# Altium PCB NBP7 Xilinx Virtex-II BGA456 Rev1.10.PcbDoc (part 2 of 3)
Units mm, origin at the board's own origin, x right, y up, seen from the top; angles counter-clockwise.
Board outline 69 x 80.99 mm, 6 copper layers (Top Layer, MidLayer1, InternalPlane1, InternalPlane2, MidLayer2, Bottom Layer); 101 components, 273 nets, 963 pads, 545 vias.
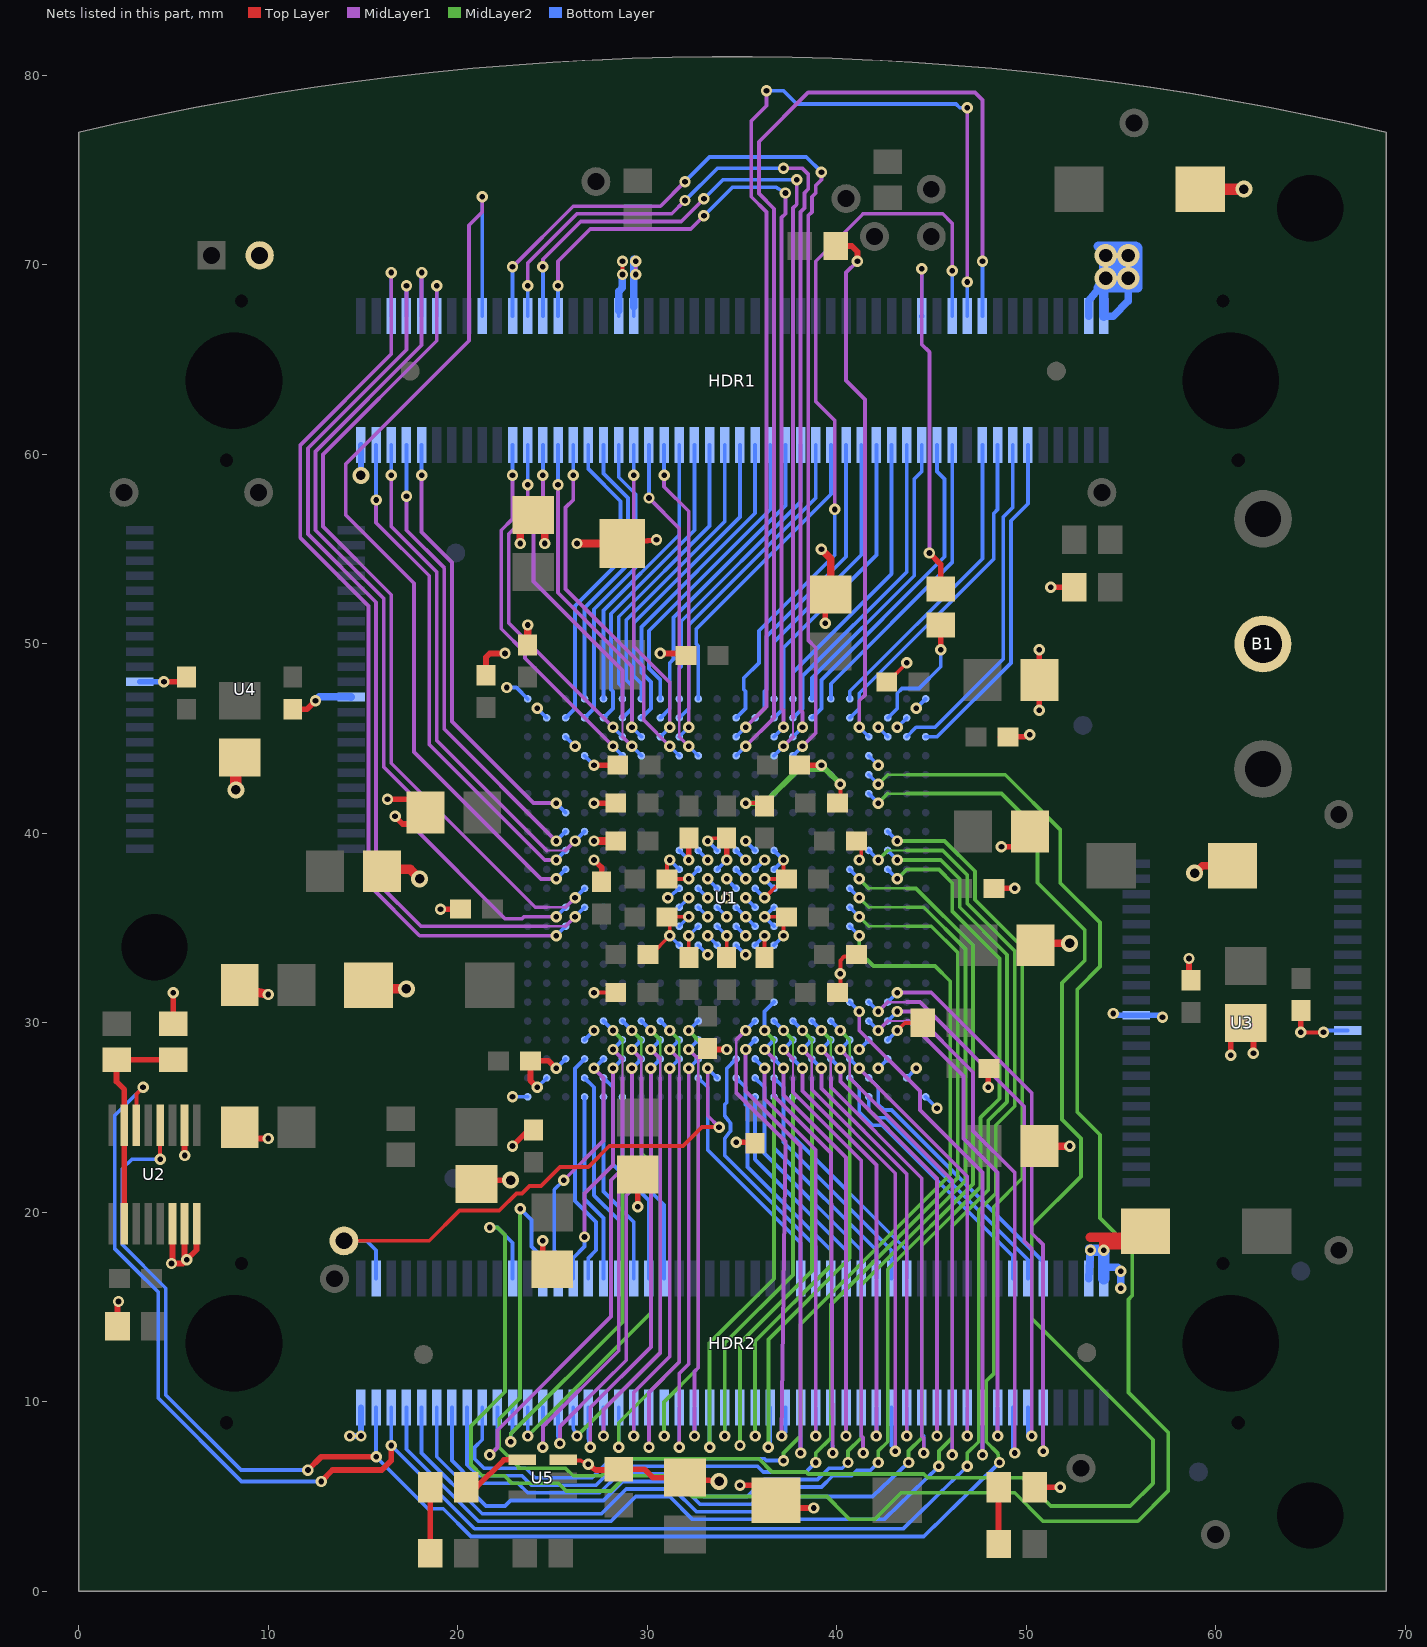
[diagram p6: the nets of this part, all layers, seen from the top]

## Via types
v1: diameter 0.6, hole 0.3, Top Layer to Bottom Layer, tented bottom, 520 vias
v2: diameter 0.9, hole 0.5, Top Layer to Bottom Layer, 17 vias
v3: diameter 1.2, hole 0.7, Top Layer to Bottom Layer, 8 vias

## Nets (pads, with @x,y where several pads share a name; then routed paths per layer and width w, separated by ;. In a path a pad name is that pad's centre, name@x,y a point inside that pad or via, vN(x,y) a via of type N, cw(c..) or ccw(c..) an arc to the next point about the centre after c; other vN are vias at no path point) (continued)
GND: B1.2 C1.2 C2.2 C3.2 C4.2 C5.2 C6.2 C7.2 C8.2 C9.2 C10.2 C11.2 C12.2 C13.2 C14.2 C15.2 C16.2 C17.2 C18.2 C19.2 C20.2 C22.2 C23.2 C24.2 C25.2 C26.2 C27.2 C28.2 C29.2 C30.2 C31.2 C32.2 C33.2 C34.2 C35.2 C36.2 C37.2 C38.2 C39.2 C40.2 C41.2 C42.2 C43.2 C44.2 C45.2 C46.2 C47.2 C48.2 C49.2 C50.2 C51.2 C52.2 C53.2 C54.2 C55.2 C56.2 C57.2 C58.2 C59.2 C60.2 C61.2 C62.2 HDR1.1 HDR1.36 HDR1.38 HDR1.98 HDR1.100 HDR2.1 HDR2.98 HDR2.100 JP1.2 LED1.2 R9.2 R10.1 U1.A1 U1.A22 U1.AA2 U1.AA21 U1.AB1 U1.AB22 U1.B2 U1.B21 U1.C3 U1.C20 U1.D4 U1.D19 U1.J9 U1.J10 U1.J11 U1.J12 U1.J13 U1.J14 U1.K9 U1.K10 U1.K11 U1.K12 U1.K13 U1.K14 U1.L9 U1.L10 U1.L11 U1.L12 U1.L13 U1.L14 U1.M9 U1.M10 U1.M11 U1.M12 U1.M13 U1.M14 U1.N9 U1.N10 U1.N11 U1.N12 U1.N13 U1.N14 U1.P9 U1.P10 U1.P11 U1.P12 U1.P13 U1.P14 U1.W4 U1.W19 U1.Y3 U1.Y20 U2.6 U2.7 U2.8 U2.10 U3.12 U3.34 U4.12 U4.34 U5.3 | length 241
  Top Layer w0.2: C7.2@8.5,44.3 8.638,44.092 8.9,43.7 C7.2@9,43.2 ; C3.2@20.5,22 20.639,21.414 C3.2@20.644,21.398 ; U5.3@25.6,7 25.9,6.9 26.5,6.9 v1(26.9,6.7) ; v1(27.2,31.6) C50.2@28.2,31.6 ; C45.2@28.2,39.6 C45.2@28.35,39.6 ; v1(28.7,69.5) v1(28.7,70.2) ; v1(29.5,20.3) C4.2@29.5,22 ; C43.2@30.05,33.6 30.2,33.6 v1(31.2,34.6) C32.2@31.2,35.6 ; C32.2@31.05,35.6 C32.2@31.2,35.6 ; v1(31.2,38.6) 31.05,38.45 C37.2@31.05,37.6 v1(32.2,37.6) ; C36.2@32.2,33.45 v1(32.2,34.6) ; v1(32.2,35.6) C32.2@31.2,35.6 ; v1(33.2,39.6) 33.3,39.6 33.45,39.75 C25.2@34.2,39.75 ; C26.2@34.2,33.45 v1(34.2,34.6) ; v1(35.2,41.6) C19.2@36.1,41.6 ; C20.2@36.2,33.45 v1(36.2,34.6) ; v1(36.2,35.6) C31.2@37.3,35.6 ; v1(36.2,36.6) 37,37.4 C30.2@37.1,37.4 ; v1(36.2,37.6) C30.2@37.35,37.6 37.35,37.75 37.2,37.9 v1(37.2,38.6) ; C56.2@36.8,4.4 v1(38.8,4.4) ; v1(37.2,34.6) C31.2@37.2,35.4 ; C48.2@40.05,31.6 40.2,31.6 v1(40.2,32.6) 40.2,33.3 40.4,33.5 40.7,33.5 40.994,33.412 C47.2@41.2,33.35 ; C44.2@40.2,41.6 v1(40.2,42.6) ; C46.2@40.95,39.35 C46.2@40.95,39.6 ; v1(41.2,38.6) 41.3,38.7 C46.2@41.3,39.4 ; C22.2@42.65,48 C22.2@42.7,48 ; C22.2@42.8,48 C22.2@42.7,48 ; v1(43.7,49) C22.2@42.7,48 ; C39.2@47.95,27.6 C39.2@48.05,27.6 C39.2@48.047,27.548 ; C34.2@48.6,45.1 C34.2@49.05,45.1 ; v1(49.4,37.1) v1@49.45,37.1 ; C16.2@49.5,40 C16.2@49.7,40.1 ; C13.2@50.4,47.7 50.7,47.76 C13.2@50.765,47.773 ; LED1.2@50.45,5.5 LED1.2@50.6,5.5 ; C15.2@50.825,23.975 51.325,24.35 50.7,24.2 50.94,23.72 50.98,23.64 51,23.6 51.1,23.4 51.1,23.5 51.1,23.7 C15.2@51.2,23.5 ; C33.2@58.5,32.35 C33.2@58.6,32.35 ; C33.2@58.6,32.3 C33.2@58.6,32.349 ; v1(58.6,33.4) C33.2@58.6,32.35 ; C33.2@58.7,32.25 C33.2@58.6,32.349 ; v1(60.8,28.3) C2.2@60.8,29.6 ; v1(62,28.4) C2.2@62,29.5 ; v1(64.5,29.5) v1(65.7,29.5) ; C33.2@58.6,32.349 58.5,32.35 C33.2@58.6,32.35
  Top Layer w0.3: R10.1@2.05,14 2.05,15.25 v1(2.1,15.3) ; v1(4.5,48) C41.2@5.7,48 ; C51.2@4.8,30.1 4.865,29.905 C51.2@5,29.5 ; U2.6@4.952,19.4 4.952,17.353 v1(4.9,17.3) 5.5,17.3 v1(5.7,17.5) ; C51.2@5,29.95 v1(5,31.6) ; U2.10@5.587,24.6 5.587,23.012 v1(5.6,23) ; U2.7@5.6,19.387 U2.7@5.587,19.4 5.587,17.612 v1(5.7,17.5) ; U2.8@6.222,19.4 6.222,18.023 v1(5.7,17.5) ; C9.2@8.5,23.9 v1(10,23.9) ; C42.2@11.3,46.55 12.05,46.55 v1(12.5,47) ; v1(16.3,41.8) 17.6,41.8 C11.2@17.9,41.7 ; v1(16.7,40.9) 17.1,40.5 C11.2@17.9,40.5 ; v1(19.1,36) C28.2@20.15,36 ; C3.2@21,21.7 v2(22.8,21.7) ; C24.2@21.5,48.3 C24.2@21.5,48.35 21.5,49.3 21.7,49.5 v1(22.5,49.5) ; v1(22.9,23.5) 23.75,24.35 C27.2@24,24.35 ; v1(24.2,26.6) 23.85,26.95 C38.2@23.85,28 24.8,28 v1(25.2,27.6) ; v1(24.5,18.5) 24.5,17.5 C14.2@24.9,17.5 ; v1(26.9,6.7) 27.3,6.4 C52.2@28.5,6.4 ; v1(27.2,38.6) 27.6,38.2 C59.2@27.6,37.45 ; v1(27.2,41.6) C49.2@28.3,41.6 ; v1(27.2,43.6) C61.2@28.45,43.6 ; C52.2@28.5,6.45 29.85,6.45 30.3,6 C1.2@32,6 v2(33.8,5.8) ; C53.2@28.7,55.3 v1(30.5,55.5) ; v1(29.5,20.3) C4.2@29.5,21.9 ; v1@30.7,49.6 v1(30.7,49.5) 31.8,49.5 C35.2@32.05,49.4 ; v1(32.2,38.6) C40.2@32.2,39.75 ; C62.2@33.2,28.65 33.25,28.6 v1(34.2,28.6) ; v1(34.2,38.6) C25.2@34.2,39.75 ; v1(34.7,23.7) C17.2@35.7,23.7 ; v1(34.9,5.6) C56.2@36.6,5.6 ; C56.2@36.5,4.4 36.8,4.4 v1(38.8,4.4) ; C60.2@38.05,43.6 38.35,43.75 38.3,43.6 v1(39.2,43.6) ; v1(39.4,51.1) 39.4,52.6 39.697,52.631 C5.2@39.7,52.631 ; C5.2@39.5,53 39.7,52.9 C5.2@39.7,52.644 ; C5.2@39.6,52.7 C5.2@39.7,52.644 ; C5.2@39.7,52.6 C5.2@39.7,52.631 ; v1(48,26.6) C39.2@48,27.55 ; C29.2@48.3,37.1 v1(49.4,37.1) ; v1(48.7,39.3) 49.4,39.3 C16.2@50.2,40.1 ; C34.2@49.05,45.1 49.9,45.1 ; LED1.2@50.6,5.5 v1(51.8,5.5) ; v1(50.7,46.5) 50.7,47.76 C13.2@50.7,48.1 v1(50.7,49.7) ; v1(51.3,53) R9.2@52.55,53 ; R9.2@52.55,52.9 R9.2@52.6,52.9 ; C33.2@58.6,32.35 v1(58.6,33.4) ; v1(60.8,28.3) C2.2@60.8,29.8 ; v1(62,28.4) C2.2@62,29.6 ; v1(64.5,29.5) C18.2@64.5,30.65 ; C5.2@39.7,52.631 39.719,52.633 C5.2@39.7,52.644 ; C5.2@39.7,52.631 C5.2@39.7,52.644
  Top Layer w0.4: C8.2@7.85,31.35 C8.2@7.9,31.4 ; v1(23.3,55.3) 23.3,56.3 C12.2@24,56.8 ; C23.2@23.7,50.1 v1(23.7,51) ; v1(24.6,55.3) C12.2@24.6,56.5 ; v1(26.3,55.3) C53.2@28.7,55.3 ; v1(27.2,39.6) C45.2@28.35,39.6 ; v1(39.2,55) 39.7,54.5 39.7,52.9 39.7,52.644 39.7,52.631 C5.2@39.7,52.6 ; C6.2@50.7,34.2 v2(52.3,34.2) ; C15.2@51.2,23.5 v1(52.3,23.5) ; v2(58.9,37.9) 59.3,38.3 C55.2@60.9,38.3
  Top Layer w0.5: C8.2@8.5,31.8 v1(10,31.5) ; C54.2@15.3,31.5 15.5,31.8 v2(17.3,31.8) ; C10.2@16,38.1 C10.2@16.9,38.1 ; C10.2@16.903,38.06 C10.2@16.9,38.1 ; v2(18,37.6) 17.5,38.1 C10.2@16.9,38.1 ; C6.2@50.5,34.2 C6.2@50.7,34.2 ; 53.4,18.7 54.1,18.7 ; v1(54.1,18) 54.1,18.3 ; C57.2@55.3,18.3 54.1,18.3 ; C57.2@56,18.7 54.1,18.7 ; 54.1,18.3 54.1,18.7
  Top Layer w0.6: v2(8.3,42.3) C7.2@8.3,44 ; C58.2@59.2,74 v2(61.5,74)
  MidLayer1 w0.2: v1(29.4,69.5) v1(29.4,70.2)
  MidLayer2 w0.3: v1(35.2,41.6) 36.2,41.6 38,43.4 39.2,43.4 39.4,43.4 v1(40.2,42.6)
  Bottom Layer w0.2: v1(22.6,47.7) 23.1,47.7 U1.AB1@23.7,47.1 ; v1(22.9,26.1) U1.A1@23.7,26.1 ; v1(24.2,26.6) U1.B2@24.7,27.1 ; v1(24.2,46.6) U1.AA2@24.7,46.1 ; v1(25.2,27.6) U1.C3@25.7,28.1 ; U1.Y3@25.7,45.1 v1(26.2,44.6) ; U1.D4@26.7,29.1 v1(27.2,29.6) ; U1.W4@26.7,44.1 v1(27.2,43.6) ; HDR1.36@28.5,67.3 HDR1.36@28.5,67.6 ; v1@29.2,69.3 29.3,69.4 v1(29.4,69.5) ; HDR1.38@29.3,67.3 HDR1.38@29.3,67.8 ; v1(31.1,36.6) U1.M9@31.7,37.1 ; v1(31.2,34.6) U1.J9@31.7,34.1 ; v1(31.2,38.6) U1.N9@31.7,38.1 ; U1.K9@31.7,35.1 v1(32.2,35.6) ; U1.L9@31.7,36.1 v1(32.2,36.6) ; U1.P9@31.7,39.1 v1(32.2,38.6) ; v1(32.2,34.6) U1.K10@32.7,35.1 ; v1(32.2,37.6) U1.N10@32.7,38.1 ; U1.J10@32.7,34.1 v1(33.2,33.6) ; U1.L10@32.7,36.1 v1(33.2,35.6) ; U1.M10@32.7,37.1 v1(33.2,36.6) ; U1.P10@32.7,39.1 v1(33.2,38.6) ; v1(33.2,34.6) U1.J11@33.7,34.1 ; v1(33.2,37.6) U1.M11@33.7,37.1 ; v1(33.2,39.6) U1.P11@33.7,39.1 ; U1.K11@33.7,35.1 v1(34.2,34.6) ; U1.N11@33.7,38.1 v1(34.2,38.6) ; U1.L11@33.7,36.1 v1(34.2,35.6) ; v1(34.2,37.6) U1.M12@34.7,37.1 ; U1.J12@34.7,34.1 v1(35.2,33.6) ; U1.K12@34.7,35.1 v1(35.2,34.6) ; U1.L12@34.7,36.1 v1(35.2,35.6) U1.K13@35.7,35.1 ; U1.N12@34.7,38.1 v1(35.2,37.6) ; U1.P12@34.7,39.1 v1(35.2,38.6) ; v1(35.2,36.6) U1.L13@35.7,36.1 ; v1(35.2,39.6) U1.P13@35.7,39.1 ; U1.J13@35.7,34.1 v1(36.2,34.6) ; U1.M13@35.7,37.1 v1(36.2,36.6) ; U1.N13@35.7,38.1 v1(36.2,38.6) ; v1(36.2,37.6) U1.M14@36.7,37.1 ; U1.J14@36.7,34.1 v1(37.2,34.6) ; U1.K14@36.7,35.1 v1(36.2,35.6) U1.L14@36.7,36.1 ; U1.N14@36.7,38.1 v1(37.2,38.6) U1.P14@36.7,39.1 ; v1(41.2,28.6) U1.D19@41.7,29.1 ; U1.W19@41.7,44.1 v1(42.2,43.6) ; v1(42.2,27.6) U1.C20@42.7,28.1 ; v1(42.2,45.6) U1.Y20@42.7,45.1 ; v1(43.2,45.6) U1.AA21@43.7,46.1 ; U1.B21@43.7,27.1 v1(44.2,27.6) ; v1(44.2,46.6) U1.AB22@44.7,47.1 ; U1.A22@44.7,26.1 v1(45.3,25.5) ; v1(54.6,30.5) U3.12@55.825,30.4 ; v1(65.7,29.5) 65.7,29.6 65.8,29.6 U3.34@66.975,29.6 ; U3.12@55.825,30.4 56.1,30.4 U3.12@55.825,30.4
  Bottom Layer w0.3: U4.12@3.225,48 v1(4.5,48) ; v1(14.3,8.2) v1(14.9,8.2) HDR2.1@14.9,9.7 ; v2(14.9,58.9) HDR1.1@14.9,60.5 ; v1(54.6,30.5) 54.7,30.4 U3.12@55.825,30.4 ; U3.12@55.825,30.4 56.1,30.4 57.2,30.4 v1(57.2,30.3) ; v1(65.7,29.5) v1@65.8,29.6
  Bottom Layer w0.4: v1(12.5,47) 12.71,47.21 U4.34@14.375,47.2 ; HDR1.36@28.5,67.6 28.5,68.6 28.7,68.8 v1(28.7,69.5) ; HDR1.38@29.3,67.8 29.3,69.4 29.3,69.5 29.3,70.2 v1@29.3,70.3 ; HDR2.98@53.3,16.5 v1(53.4,18) v1@53.3,18.1 ; HDR1.98@53.3,67.3 53.3,68.1 53.8,68.7 53.8,68.8 53.8,68.9 54.1,69.2 v3(54.2,69.3) v3(54.2,70.5) v3@54.2,70.6 ; HDR2.100@54.1,16.5 54.1,17.1 54.835,17.101 v1(55,16.9) v1(55,16) ; HDR1.100@54.1,67.3 54.6,67.3 55.4,68.1 55.4,68.8 v3(55.4,69.3) 55.4,69.5 v3(55.4,70.5)
  Bottom Layer w0.5: 53.8,68.8 v3@54.1,68.8 ; 53.8,71 54.2,71 55.4,71 55.8,71 55.85,70.95 55.9,70.9 55.9,70.5 55.9,69.3 55.9,68.8 55.8,68.8 ; HDR1.100@54.1,67.3 v3@54.1,68.8 ; v3@54.9,70.2 v3@54.9,69.3 ; v3@54.1,68.8 54.1,69.2 54.1,69.3 54.1,70.5 54.1,70.9 54.2,70.9 55.4,70.9 55.8,70.9 55.8,70.5 55.8,69.3 55.8,68.8 ; v3@54.1,68.8 54.2,68.8 55.4,68.8 v3@55.5,68.8 ; v3@54.9,69.3 v3@55.2,69.3 ; v3@54.9,69.3 54.5,69.3 54.6,69.4 54.6,70.5 54.6,70.6 54.7,70.5 54.8,70.5 55.1,70.2 55.2,70.1 v3@55.2,69.3 ; v3@55.2,69.3 55.3,69.4 55.4,69.5 55.5,69.6 55.5,69.3 v3@55.5,68.8 ; v3@55.5,68.8 55.8,68.8
  Bottom Layer w0.6: v1(53.4,18) v1(54.1,18) 54.1,17.1 HDR2.100@54.1,16.5
  other v1: 34.2,36.6 50.2,45.2
GREEN0: HDR1.10 U1.L3 | length 46.3
  MidLayer1 w0.2: v1(18.1,69.6) 18.1,65.763 12.5,60.163 12.5,56 16.1,52.4 16.1,43.5 17.533,42.067 17.533,40.467 22.5,35.5 23.4,35.5 23.5,35.6 v1(25.2,35.6)
  Bottom Layer w0.2: HDR1.10@18.1,67.3 v1(18.1,69.6) ; v1(25.2,35.6) U1.L3@25.7,36.1
GREEN1: HDR1.12 U1.M4 | length 44.5
  MidLayer1 w0.127: 24.7,36.1 25.7,36.1
  MidLayer1 w0.2: v1(18.9,68.9) 18.9,65.997 12.9,59.997 12.9,56.2 16.5,52.6 16.5,43.7 24.1,36.1 24.7,36.1 ; 25.7,36.1 v1(26.2,36.6)
  Bottom Layer w0.2: HDR1.12@18.9,67.3 v1(18.9,68.9) ; v1(26.2,36.6) U1.M4@26.7,37.1
HDRIVE: HDR1.18 U1.N3 | length 51.1
  MidLayer1 w0.2: v1(21.3,73.6) 21.3,72.8 20.6,72.1 20.6,66 14.1,59.5 14.1,56.8 17.7,53.2 17.7,44.3 24.4,37.6 v1(25.2,37.6)
  Bottom Layer w0.2: HDR1.18@21.3,67.3 v1(21.3,73.6) ; v1(25.2,37.6) U1.N3@25.7,38.1
IO0: HDR2.7 U1.P20 | length 72
  MidLayer2 w0.2: v1(43.2,38.6) 45.5,38.6 46.5,37.6 46.5,36.1 49,33.6 49,25.834 48,24.834 48,21.172 46.1,19.272 46.1,8.1 45.4,7.4 v1(45.4,6.6)
  Bottom Layer w0.2: HDR2.7@17.3,9.7 17.3,7.5 21.1,3.7 28.1,3.7 29.4,5 31.2,5 32.4,3.8 42.5,3.8 v1(45.4,6.6) ; U1.P20@42.7,39.1 v1(43.2,38.6)
IO1: HDR2.9 U1.N20 | length 69.2
  MidLayer2 w0.2: v1(43.2,37.6) 43.7,38.1 45.4,38.1 46.1,37.4 46.1,35.9 48.6,33.4 48.6,26 47.6,25 47.6,21.337 44.5,18.237 44.5,8.1 43.8,7.4 v1(43.8,6.8)
  Bottom Layer w0.2: HDR2.9@18.1,9.7 18.1,7.3 21.3,4.1 27.6,4.1 28.9,5.4 31.4,5.4 32.6,4.2 35.8,4.2 36.6,5 41.9,5 v1(43.8,6.8) ; U1.N20@42.7,38.1 v1(43.2,37.6)
IO2: HDR2.11 U1.N18 | length 66.4
  MidLayer2 w0.127: 41.7,37.1 43.7,37.1
  MidLayer2 w0.2: v1(41.2,37.6) 41.7,37.1 ; v1(42.2,6.8) 42.2,7.4 42.7,7.9 42.7,17.003 47.2,21.503 47.2,34.1 44.2,37.1 43.7,37.1
  Bottom Layer w0.2: HDR2.11@18.9,9.7 18.9,7.1 21.5,4.5 22.5,4.5 22.8,4.8 27.7,4.8 28.7,5.8 31.6,5.8 32.8,4.6 35.5,4.6 36.4,5.5 39.2,5.5 39.8,6.1 40.8,6.1 41.085,6.385 41.8,6.4 v1(42.2,6.8) ; U1.N18@40.7,38.1 v1(41.2,37.6)
IO3: HDR2.13 U1.M18 | length 63.2
  MidLayer2 w0.127: 41.7,36.1 43.7,36.1
  MidLayer2 w0.2: v1(40.6,6.8) 40.6,7.4 41.3,8.1 41.3,16.169 46.8,21.669 46.8,33.9 44.6,36.1 43.7,36.1 ; v1(41.2,36.6) 41.7,36.1
  Bottom Layer w0.2: HDR2.13@19.7,9.7 19.7,6.9 20.9,5.7 23.2,5.7 23.7,5.2 27.5,5.2 28.5,6.2 31.8,6.2 33,5 35.3,5 36.2,5.9 39,5.9 39.6,6.5 40.3,6.5 v1(40.6,6.8) ; U1.M18@40.7,37.1 v1(41.2,36.6)
IO4: HDR2.15 U1.L18 | length 59.3
  MidLayer2 w0.127: 41.7,35.1 43.7,35.1
  MidLayer2 w0.2: v1(38.9,6.8) 38.9,7.3 39.7,8.1 39.7,15.134 46.4,21.834 46.4,33.7 45,35.1 43.7,35.1 ; v1(41.2,35.6) 41.7,35.1
  Bottom Layer w0.2: HDR2.15@20.5,9.7 20.5,6.7 21.1,6.1 23.4,6.1 23.9,5.6 27.3,5.6 28.3,6.6 35.834,6.6 36.134,6.3 38.4,6.3 38.5,6.4 v1(38.9,6.8) ; U1.L18@40.7,36.1 v1(41.2,35.6)
IO5: HDR2.17 U1.K18 | length 56
  MidLayer2 w0.2: v1(37.2,6.9) 37.2,7.3 38.1,8.2 38.1,14.1 46,22 46,32.2 45.2,33 41.949,33 41.2,33.749 v1(41.2,34.6)
  Bottom Layer w0.2: HDR2.17@21.3,9.7 21.3,8 20.9,7.6 20.9,7 21.4,6.5 23.6,6.5 24.1,6 27.1,6 28.1,7 36.2,7 36.3,6.9 v1(37.2,6.9) ; U1.K18@40.7,35.1 v1(41.2,34.6)
IO6: HDR2.19 U1.D6 | length 27.9
  MidLayer1 w0.127: 28.7,27.1 28.7,28.1
  MidLayer1 w0.2: v1(21.7,7.2) 22.1,7.6 22.1,8.5 28.1,14.5 28.1,21.7 28.7,22.3 28.7,27.1 ; v1(28.2,28.6) 28.7,28.1
  Bottom Layer w0.2: v1(21.7,7.2) 22.1,7.6 HDR2.19@22.1,9.7 ; v1(28.2,28.6) U1.D6@28.7,29.1
IO7: HDR2.21 U1.E5 | length 26.9
  MidLayer2 w0.127: 28.7,27.1 28.7,29.1
  MidLayer2 w0.2: v1(22.8,7.9) 22.8,8.3 28.7,14.2 28.7,27.1 ; v1(28.2,29.6) 28.7,29.1
  Bottom Layer w0.2: v1(22.8,7.9) 22.8,8.3 22.9,8.4 HDR2.21@22.9,9.7 ; U1.E5@27.7,30.1 v1(28.2,29.6)
IO8: HDR2.23 U1.E6 | length 26.7
  MidLayer2 w0.127: 29.7,27.1 29.7,29.1
  MidLayer2 w0.2: v1(23.7,8.2) 30.2,14.7 30.2,22.6 29.7,23.1 29.7,27.1 ; v1(29.2,29.6) 29.7,29.1
  Bottom Layer w0.2: v1(23.7,8.2) HDR2.23@23.7,9.7 ; U1.E6@28.7,30.1 v1(29.2,29.6)
IO9: HDR2.25 U1.C7 | length 24.8
  MidLayer1 w0.2: v1(24.5,7.6) 24.5,8.7 28.5,12.7 28.5,21.3 29.2,22 v1(29.2,27.6)
  Bottom Layer w0.2: v1(24.5,7.6) 24.5,8.2 HDR2.25@24.5,9.7 ; v1(29.2,27.6) U1.C7@29.7,28.1
IO10: HDR2.27 U1.D7 | length 25.5
  MidLayer1 w0.127: 29.7,27.1 29.7,28.1
  MidLayer1 w0.2: v1(25.4,7.8) 25.4,8.7 27.664,10.964 28.9,12.2 28.9,20.9 29.7,21.7 29.7,27.1 ; v1(29.2,28.6) 29.7,28.1
  Bottom Layer w0.2: v1@25.3,7.7 v1(25.4,7.8) 25.3,8.2 HDR2.27@25.3,9.7 ; v1(29.2,28.6) U1.D7@29.7,29.1
IO11: HDR2.29 U1.E7 | length 25.9
  MidLayer2 w0.127: 30.7,27.1 30.7,29.1
  MidLayer2 w0.2: v1(26.3,8.2) 30.7,12.6 30.7,27.1 ; v1(30.2,29.6) 30.7,29.1
  Bottom Layer w0.2: v1@26.1,8.2 v1(26.3,8.2) 26.1,8.6 HDR2.29@26.1,9.7 ; U1.E7@29.7,30.1 v1(30.2,29.6)
IO12: HDR2.31 U1.C8 | length 24.2
  MidLayer1 w0.2: v1(27,7.6) 27,9.7 30.2,12.9 v1(30.2,27.6)
  Bottom Layer w0.2: v1@26.9,7.6 v1(27,7.6) 26.9,8.1 HDR2.31@26.9,9.7 ; v1(30.2,27.6) U1.C8@30.7,28.1
IO13: HDR2.33 U1.D8 | length 24.1
  MidLayer1 w0.127: 30.7,27.1 30.7,28.1
  MidLayer1 w0.2: v1(27.7,8.2) 27.7,9.6 30.7,12.6 30.7,27.1 ; v1(30.2,28.6) 30.7,28.1
  Bottom Layer w0.2: v1(27.7,8.2) HDR2.33@27.7,9.7 ; v1(30.2,28.6) U1.D8@30.7,29.1
IO14: HDR2.35 U1.E8 | length 26.3
  MidLayer2 w0.127: 31.7,27.1 31.7,29.1
  MidLayer2 w0.2: v1(28.5,7.6) 28.5,8.9 31.7,12.1 31.7,27.1 ; v1(31.2,29.6) 31.7,29.1
  Bottom Layer w0.2: v1(28.5,7.6) HDR2.35@28.5,9.7 ; U1.E8@30.7,30.1 v1(31.2,29.6)
IO15: HDR2.37 U1.C9 | length 22.4
  MidLayer1 w0.2: v1(29.3,8.2) 29.3,10.5 31.2,12.4 v1(31.2,27.6)
  Bottom Layer w0.2: v1(29.3,8.2) HDR2.37@29.3,9.7 ; v1(31.2,27.6) U1.C9@31.7,28.1
IO16: HDR2.39 U1.D9 | length 24.7
  MidLayer1 w0.127: 31.7,27.1 31.7,28.1
  MidLayer1 w0.2: v1(30.1,7.6) 30.1,10.5 31.7,12.1 31.7,27.1 ; v1(31.2,28.6) 31.7,28.1
  Bottom Layer w0.2: v1(30.1,7.6) HDR2.39@30.1,9.7 ; v1(31.2,28.6) U1.D9@31.7,29.1
IO17: HDR2.41 U1.E10 | length 24.6
  MidLayer2 w0.127: 32.7,27.1 32.7,28.1
  MidLayer2 w0.2: v1(30.9,8.2) 30.9,10 32.7,11.8 32.7,27.1 ; v1(32.2,29.6) 32.8,29 32.8,28.2 32.7,28.1
  Bottom Layer w0.2: v1(30.9,8.2) HDR2.41@30.9,9.7 ; v1(32.2,29.6) U1.E10@32.7,30.1
IO18: HDR2.43 U1.C10 | length 23
  MidLayer1 w0.2: v1(31.7,7.6) 31.7,11.5 32.2,12 v1(32.2,27.6)
  Bottom Layer w0.2: v1(31.7,7.6) HDR2.43@31.7,9.7 ; v1(32.2,27.6) U1.C10@32.7,28.1
IO19: HDR2.45 U1.D10 | length 22.9
  MidLayer1 w0.127: 32.7,27.1 32.7,28.1
  MidLayer1 w0.2: v1(32.2,28.6) 32.7,28.1 ; v1(32.5,8.2) 32.5,11.6 32.7,11.8 32.7,27.1
  Bottom Layer w0.2: v1(32.2,28.6) U1.D10@32.7,29.1 ; v1(32.5,8.2) HDR2.45@32.5,9.7
IO20: HDR2.47 U1.F14 | length 27.4
  MidLayer2 w0.127: 36.7,27.1 36.7,29.1
  MidLayer2 w0.2: v1(33.3,7.6) 33.3,13.1 36.7,16.5 36.7,27.1 ; v1(36.2,29.6) 36.7,29.1
  Bottom Layer w0.2: v1(33.3,7.6) HDR2.47@33.3,9.7 ; v1(36.2,29.6) 36.2,30.6 U1.F14@36.7,31.1
IO21: HDR2.49 U1.E14 | length 25.3
  MidLayer2 w0.127: 37.7,27.1 37.7,29.1
  MidLayer2 w0.2: v1(34.1,8.2) 34.1,13.1 37.7,16.7 37.7,27.1 ; v1(37.2,29.6) 37.7,29.1
  Bottom Layer w0.2: v1(34.1,8.2) HDR2.49@34.1,9.7 ; U1.E14@36.7,30.1 v1(37.2,29.6)
IO22: HDR2.51 U1.E15 | length 26.4
  MidLayer2 w0.127: 38.7,27.1 38.7,29.1
  MidLayer2 w0.2: v1(34.9,7.7) 34.9,13.1 38.7,16.9 38.7,27.1 ; v1(38.2,29.6) 38.7,29.1
  Bottom Layer w0.2: v1(34.9,7.7) HDR2.51@34.9,9.7 ; U1.E15@37.7,30.1 v1(38.2,29.6)
IO23: HDR2.53 U1.E16 | length 25.5
  MidLayer2 w0.127: 39.7,27.1 39.7,29.1
  MidLayer2 w0.2: v1(35.7,8.2) 35.7,13.2 39.7,17.2 39.7,27.1 ; v1(39.2,29.6) 39.7,29.1
  Bottom Layer w0.2: v1(35.7,8.2) HDR2.53@35.7,9.7 ; U1.E16@38.7,30.1 v1(39.2,29.6)
IO24: HDR2.55 U1.E17 | length 26.8
  MidLayer2 w0.127: 40.7,27.1 40.7,29.1
  MidLayer2 w0.2: v1(36.4,7.6) 36.4,13.3 40.7,17.6 40.7,27.1 ; v1(40.2,29.6) 40.7,29.1
  Bottom Layer w0.2: v1@36.5,7.6 HDR2.55@36.5,9.7 ; U1.E17@39.7,30.1 v1(40.2,29.6)
IO25: HDR2.57 U1.E13 | length 25
  MidLayer1 w0.127: 34.7,28.1 34.7,29.1
  MidLayer1 w0.2: 34.7,28.1 34.7,26.334 37.3,23.734 v1(37.1,8.2) ; 34.7,29.1 v1(35.2,29.6)
  Bottom Layer w0.2: v1(35.2,29.6) U1.E13@35.7,30.1 ; v1(37.1,8.2) 37.3,8.4 HDR2.57@37.3,9.7
IO26: HDR2.59 U1.D13 | length 25.6
  MidLayer1 w0.2: v1(35.2,28.6) 35.2,26.4 38.1,23.5 v1(38.1,7.3)
  Bottom Layer w0.2: v1(35.2,28.6) U1.D13@35.7,29.1 ; v1(38.1,7.3) HDR2.59@38.1,9.7
IO27: HDR2.61 U1.C13 | length 22.7
  MidLayer1 w0.2: v1(36.2,27.6) 36.2,26 38.9,23.3 v1(38.9,8.2)
  Bottom Layer w0.2: U1.C13@35.7,28.1 v1(36.2,27.6) ; v1(38.9,8.2) HDR2.61@38.9,9.7
IO28: HDR2.63 U1.D14 | length 25.9
  MidLayer1 w0.127: 36.7,27.1 36.7,28.1
  MidLayer1 w0.2: v1(36.2,28.6) 36.7,28.1 ; 36.7,27.1 36.7,26.134 39.7,23.134 v1(39.8,7.3)
  Bottom Layer w0.2: v1(36.2,28.6) U1.D14@36.7,29.1 ; HDR2.63@39.7,9.7 v1(39.8,7.3)
IO29: HDR2.65 U1.C14 | length 23
  MidLayer1 w0.2: v1(37.2,27.6) 37.2,26.2 40.5,22.9 v1(40.5,8.2)
  Bottom Layer w0.2: U1.C14@36.7,28.1 v1(37.2,27.6) ; v1(40.5,8.2) HDR2.65@40.5,9.7
IO30: HDR2.67 U1.D15 | length 26.2
  MidLayer1 w0.127: 37.7,27.1 37.7,28.1
  MidLayer1 w0.2: v1(37.2,28.6) 37.7,28.1 ; 37.7,27.1 37.7,26.337 41.3,22.737 41.3,8.2 41.4,8.1 v1(41.4,7.3)
  Bottom Layer w0.2: v1(37.2,28.6) U1.D15@37.7,29.1 ; HDR2.67@41.3,9.7 41.3,8.2 41.4,8.1 v1(41.4,7.3)
IO31: HDR2.69 U1.C15 | length 23.2
  MidLayer1 w0.2: v1(38.2,27.6) 38.2,26.403 42.1,22.503 v1(42.1,8.2)
  Bottom Layer w0.2: U1.C15@37.7,28.1 v1(38.2,27.6) ; v1(42.1,8.2) HDR2.69@42.1,9.7
IO32: HDR2.71 U1.D16 | length 26.3
  MidLayer1 w0.127: 38.7,27.1 38.7,28.1
  MidLayer1 w0.2: v1(38.2,28.6) 38.7,28.1 ; 38.7,27.1 38.7,26.469 43.1,22.069 v1(43.1,7.4)
  Bottom Layer w0.2: v1(38.2,28.6) U1.D16@38.7,29.1 ; HDR2.71@42.9,9.7 42.9,7.7 v1(43.1,7.4)
IO33: HDR2.73 U1.C16 | length 23.5
  MidLayer1 w0.2: v1(39.2,27.6) 39.2,26.534 43.7,22.034 v1(43.7,8.2)
  Bottom Layer w0.2: U1.C16@38.7,28.1 v1(39.2,27.6) ; v1(43.7,8.2) HDR2.73@43.7,9.7
IO34: HDR2.75 U1.D17 | length 26.8
  MidLayer1 w0.127: 39.7,27.1 39.7,28.1
  MidLayer1 w0.2: v1(39.2,28.6) 39.7,28.1 ; 39.7,27.1 39.7,26.6 44.5,21.8 44.5,8.2 44.6,8.1 v1(44.6,7.3)
  Bottom Layer w0.2: v1(39.2,28.6) U1.D17@39.7,29.1 ; v1@44.5,7.3 v1(44.6,7.3) 44.6,8.2 44.5,8.3 HDR2.75@44.5,9.7
IO35: HDR2.77 U1.C17 | length 23.7
  MidLayer1 w0.2: v1(40.2,27.6) 40.2,26.9 45.3,21.8 v1(45.3,8.2)
  Bottom Layer w0.2: U1.C17@39.7,28.1 v1(40.2,27.6) ; v1(45.3,8.2) HDR2.77@45.3,9.7
JIOA0: HDR1.3 U1.P3 | length 26.7
  MidLayer1 w0.2: v1(15.7,57.6) 15.7,56.4 18.5,53.6 18.5,44.7 24.6,38.6 v1(25.2,38.6)
  Bottom Layer w0.2: v1@15.7,57.8 HDR1.3@15.7,60.5 ; v1(25.2,38.6) U1.P3@25.7,39.1
JIOA1: HDR1.5 U1.R4 | length 27.2
  MidLayer1 w0.127: 24.7,39.1 25.7,39.1
  MidLayer1 w0.2: v1(16.5,58.9) 16.5,56.2 18.9,53.8 18.9,44.9 24.7,39.1 ; 25.7,39.1 v1(26.2,39.6)
  Bottom Layer w0.2: v1(16.5,58.9) HDR1.5@16.5,60.5 ; v1(26.2,39.6) U1.R4@26.7,40.1
JIOA2: HDR1.7 U1.R3 | length 24.9
  MidLayer1 w0.2: v1(17.3,57.8) 17.3,56 19.3,54 19.3,45.5 v1(25.2,39.6)
  Bottom Layer w0.2: v1(17.3,57.8) HDR1.7@17.3,60.5 ; v1(25.2,39.6) U1.R3@25.7,40.1
JIOA3: HDR1.9 U1.T3 | length 23.3
  MidLayer1 w0.2: v1(18.1,58.9) 18.1,55.9 19.7,54.3 19.7,45.9 24,41.6 v1(25.2,41.6)
  Bottom Layer w0.2: v1(18.1,58.9) HDR1.9@18.1,60.5 ; v1(25.2,41.6) U1.T3@25.7,41.1
JIOB0: HDR1.83 U1.AB18 | length 16.3
  Bottom Layer w0.2: U1.AB18@40.7,47.1 40.7,47.5 47.7,54.5 HDR1.83@47.7,60.5
JIOB1: HDR1.85 U1.AA18 | length 17.6
  Bottom Layer w0.2: U1.AA18@40.7,46.1 41.2,46.6 41.2,47.4 48.3,54.5 48.3,56.9 48.5,57.1 HDR1.85@48.5,60.5
JIOB2: HDR1.87 U1.Y21 | length 18.3
  Bottom Layer w0.2: U1.Y21@43.7,45.1 44.2,45.6 45.2,45.6 48.8,49.2 48.8,56.7 49.3,57.2 HDR1.87@49.3,60.5
JIOB3: HDR1.89 U1.Y22 | length 18
  Bottom Layer w0.2: U1.Y22@44.7,45.1 45.3,45.1 49.2,49 49.2,56.5 50.1,57.4 HDR1.89@50.1,60.5
KBCLOCK: HDR1.22 U1.W15 | length 53.4
  MidLayer1 w0.2: v1(22.9,69.9) 26.1,73.1 30.7,73.1 v1(32,74.4) ; v1(38.2,44.6) 38.9,45.3 38.9,49.8 38.5,50.2 38.5,72.6 38.7,72.8 38.7,73.6 38.9,73.8 38.9,74.2 39.2,74.5 v1(39.2,74.9)
  Bottom Layer w0.2: HDR1.22@22.9,67.3 v1(22.9,69.9) ; v1(32,74.4) 33.3,75.7 38.4,75.7 v1(39.2,74.9) ; U1.W15@37.7,44.1 v1(38.2,44.6)
KBDATA: HDR1.24 U1.Y15 | length 49.9
  MidLayer1 w0.2: v1(23.7,68.9) 23.7,70.1 26.3,72.7 31.3,72.7 v1(32,73.4) ; v1(37.2,75.1) 38.2,75.1 38.5,74.8 38.5,74 38.3,73.8 38.3,73 38.1,72.8 38.1,46.5 38.2,46.4 v1(38.2,45.6)
  Bottom Layer w0.2: HDR1.24@23.7,67.3 v1(23.7,68.9) ; v1(32,73.4) 33.7,75.1 v1(37.2,75.1) ; U1.Y15@37.7,45.1 v1(38.2,45.6)
LCD_BCKL: HDR2.22 U1.V19 | length 107.9
  MidLayer2 w0.127: 42.7,43.1 43.7,43.1
  MidLayer2 w0.2: v1(21.7,19.2) 22.1,19.2 22.5,18.8 22.5,10.531 20.7,8.731 20.7,6.7 21.3,6.1 22.469,6.1 22.869,5.7 25.334,5.7 25.734,5.3 28.1,5.3 28.9,6.1 31.3,6.1 32.4,5 39.5,5 40.4,4.1 40.7,3.8 42,3.8 43.4,5.2 49.4,5.2 50.9,3.7 55.9,3.7 57.5,5.3 57.5,8.4 55.4,10.5 55.4,15.4 55.6,15.6 55.6,18 53.9,19.7 53.9,24.1 53.017,24.983 52.7,25.3 52.7,31.769 53.9,32.969 53.9,35.3 51.8,37.4 51.8,40.2 48.9,43.1 43.7,43.1 ; v1(42.2,42.6) 42.7,43.1
  Bottom Layer w0.2: v1(21.7,19.2) 22.1,19.2 22.9,18.4 HDR2.22@22.9,16.5 ; U1.V19@41.7,43.1 v1(42.2,42.6)
LCD_E: HDR2.26 U1.U19 | length 104.7
  MidLayer2 w0.127: 42.7,42.1 43.7,42.1
  MidLayer2 w0.2: 23.2,6.5 23.3,6.5 ; v1(23.3,20.2) 23.3,10.2 22.2,9.1 22.2,7.6 23.3,6.5 ; v1(42.2,41.6) 42.7,42.1 ; 43.7,42.1 48.7,42.1 50.6,40.2 50.6,37.4 53.1,34.9 53.1,33.3 51.9,32.1 51.9,24.9 52.9,23.9 52.9,21.9 50.3,19.3 50.3,14.4 56.7,8 56.7,5.7 55.5,4.5 51.3,4.5 49.8,6 44.8,6 44.6,6.2 38.5,6.2 38.4,6.3 36.6,6.3 35.9,7 28.5,7 27.6,6.1 26.1,6.1 25.7,6.5 23.3,6.5
  Bottom Layer w0.2: v1(23.3,20.2) 23.9,19.6 23.9,18.2 24.5,17.6 HDR2.26@24.5,16.5 ; U1.U19@41.7,42.1 v1(42.2,41.6)
LED0: HDR2.60 U1.B10 | length 12.8
  Bottom Layer w0.2: U1.B10@32.7,27.1 33.2,26.6 33.2,23.3 38.1,18.4 HDR2.60@38.1,16.5
LED1: HDR2.62 U1.C12 | length 14
  Bottom Layer w0.2: U1.C12@34.7,28.1 34.2,27.6 34.2,25.8 34.1,25.7 34.1,25.1 34.4,24.7 34.4,24.3 34.1,23.9 34.1,23 38.9,18.2 38.9,18 HDR2.62@38.9,16.5
LED2: HDR2.64 U1.B12 | length 12.7
  Bottom Layer w0.2: U1.B12@34.7,27.1 35.2,26.6 35.2,25.7 35.3,25.6 35.3,22.4 39.7,18 HDR2.64@39.7,16.5
LED3: HDR2.66 U1.A13 | length 11.6
  Bottom Layer w0.2: U1.A13@35.7,26.1 35.7,22.8 40.5,18 HDR2.66@40.5,16.5
LED4: HDR2.68 U1.B13 | length 12.9
  Bottom Layer w0.2: U1.B13@35.7,27.1 36.2,26.6 36.2,23.1 41.3,18 HDR2.68@41.3,16.5
LED5: HDR2.70 U1.A14 | length 11.8
  Bottom Layer w0.2: U1.A14@36.7,26.1 36.7,23.4 42.1,18 HDR2.70@42.1,16.5
LED6: HDR2.72 U1.B14 | length 13.2
  Bottom Layer w0.2: U1.B14@36.7,27.1 37.2,26.6 37.2,23.7 42.9,18 HDR2.72@42.9,16.5
LED7: HDR2.74 U1.A15 | length 12.1
  Bottom Layer w0.2: U1.A15@37.7,26.1 37.7,24 43.7,18 HDR2.74@43.7,16.5
MOUSECLOCK: HDR1.26 U1.W14 | length 49
  MidLayer1 w0.127: 37.7,45.1 37.7,46.1
  MidLayer1 w0.2: v1(24.5,69.9) 24.5,70.3 26.5,72.3 31.8,72.3 v1(33,73.5) ; v1(37.2,44.6) 37.7,45.1 ; 37.7,46.1 37.7,73 37.9,73.2 v1(37.9,74.5)
  Bottom Layer w0.2: HDR1.26@24.5,67.3 v1(24.5,69.9) ; v1(33,73.5) 34,74.5 v1(37.9,74.5) ; U1.W14@36.7,44.1 v1(37.2,44.6)
MOUSEDATA: HDR1.28 U1.Y14 | length 45.6
  MidLayer1 w0.2: v1(25.3,68.9) 25.3,70.2 27,71.9 32.3,71.9 v1(33,72.6) ; v1(37.2,45.6) 37.2,46.5 37.1,46.6 37.1,72.5 37.3,72.7 v1(37.3,73.8)
  Bottom Layer w0.2: HDR1.28@25.3,67.3 v1(25.3,68.9) ; v1(33,72.6) 34.5,74.1 36.8,74.1 v1(37.3,73.8) ; U1.Y14@36.7,45.1 v1(37.2,45.6)
NetC51_1: C51.1 R4.2 U2.2 U2.15 | length 11.8
  Top Layer w0.3: U2.2@2.412,19.4 U2.15@2.412,24.6 2.412,26.488 2,26.9 R4.2@2,28.05 C51.1@5,28.05
NetHDR1_76: HDR1.76 R1.2 | length 19.8
  Top Layer w0.3: v1(44.9,54.8) 45.5,54.2 R1.2@45.5,52.9
  MidLayer1 w0.2: v1(44.5,69.8) 44.5,65.8 44.9,65.4 v1(44.9,54.8)
  Bottom Layer w0.2: HDR1.76@44.5,67.3 v1(44.5,69.8)
NetLED1_1: LED1.1 R11.1 | length 3
  Top Layer w0.3: R11.1@48.55,2.5 LED1.1@48.55,5.5
NetLED2_1: LED2.1 R12.1 | length 3.5
  Top Layer w0.3: R12.1@18.55,2 LED2.1@18.55,5.5
NetLED2_2: LED2.2 U5.4 | length 3.6
  Top Layer w0.3: LED2.2@20.45,5.5 21,5.5 22.441,6.941 U5.4@23.42,6.941
NetR2_2: R2.2 U1.Y19 | length 27.9
  Top Layer w0.3: R2.2@39.95,71 40.8,71 41.1,70.7 v1(41.1,70.2)
  MidLayer1 w0.2: v1(41.1,70.2) 40.5,69.6 40.5,63.9 41.5,62.9 41.5,47.3 41.2,47 v1(41.2,45.6)
  Bottom Layer w0.2: v1(41.2,45.6) U1.Y19@41.7,45.1
NetR3_2: R3.2 U1.D20 | length 2.2
  Top Layer w0.2: v1(43.2,29.6) 43.6,30 R3.2@44.55,30
  Bottom Layer w0.2: U1.D20@42.7,29.1 v1(43.2,29.6)
NEXUS_TCK: HDR1.82 U1.Y12 | length 57.4
  MidLayer1 w0.2: v1(35.2,45.6) 36.3,46.7 36.3,72.8 35.5,73.6 35.5,77.6 36.3,78.4 v1(36.3,79.2) ; v1(46.9,69.1) v1(46.9,78.3)
  Bottom Layer w0.2: U1.Y12@34.7,45.1 v1(35.2,45.6) ; v1(36.3,79.2) 37.2,79.2 37.9,78.5 46.3,78.5 46.5,78.3 v1(46.9,78.3) ; HDR1.82@46.9,67.3 v1(46.9,69.1)
NEXUS_TDI: HDR1.84 U1.W12 | length 58
  MidLayer1 w0.2: v1(35.2,44.6) 36.7,46.1 36.7,72.966 35.9,73.766 35.9,76.5 38.5,79.1 47.3,79.1 47.7,78.7 v1(47.7,70.2)
  Bottom Layer w0.2: U1.W12@34.7,44.1 v1(35.2,44.6) ; HDR1.84@47.7,67.3 v1(47.7,70.2)
NEXUS_TDO: R1.1 U1.AA20 | length 6.6
  Top Layer w0.3: v1(45.5,49.7) R1.1@45.5,51
  Bottom Layer w0.2: U1.AA20@42.7,46.1 43.2,46.6 43.2,47.4 43.447,47.647 44.347,47.647 45.5,48.8 v1(45.5,49.7)
NEXUS_TMS: HDR1.80 U1.AA12 | length 40.1
  MidLayer1 w0.2: v1(39.9,57.1) 39.9,61.8 38.9,62.8 38.9,70.2 41.3,72.6 41.4,72.7 45.6,72.7 46.1,72.2 v1(46.1,69.7)
  Bottom Layer w0.2: U1.AA12@34.7,46.1 35.2,46.6 35.2,47.5 35.1,47.6 35.1,48.2 35.9,49 35.9,50.7 39.9,54.7 v1(39.9,57.1) ; HDR1.80@46.1,67.3 46.1,68.9 v1(46.1,69.7)
RAM0_DATA0: HDR2.42 U1.A6 | length 10.5
  Bottom Layer w0.2: U1.A6@28.7,26.1 28.7,22.6 30.9,20.4 HDR2.42@30.9,16.5
RAM0_DATA1: HDR2.40 U1.B5 | length 11.6
  Bottom Layer w0.2: U1.B5@27.7,27.1 28.2,26.6 28.2,22.534 30.1,20.634 HDR2.40@30.1,16.5
RAM0_DATA2: HDR2.38 U1.A5 | length 10.3
  Bottom Layer w0.2: U1.A5@27.7,26.1 27.7,21.1 29.3,19.5 HDR2.38@29.3,16.5
RAM0_DATA3: HDR2.36 U1.B4 | length 11.3
  Bottom Layer w0.2: U1.B4@26.7,27.1 27.2,26.6 27.2,20.9 28.5,19.6 HDR2.36@28.5,16.5
RAM0_DATA4: HDR2.34 U1.A4 | length 10
  Bottom Layer w0.2: U1.A4@26.7,26.1 26.7,20.7 27.7,19.7 HDR2.34@27.7,16.5
RAM0_DATA5: HDR2.32 U1.C4 | length 12.4
  Bottom Layer w0.2: U1.C4@26.7,28.1 26.2,27.6 26.2,20.6 27.3,19.5 27.3,18 26.9,17.6 HDR2.32@26.9,16.5
RAM0_DATA6: HDR2.30 U1.C6 | length 12.7
  MidLayer1 w0.2: v1(26.7,18.7) 26.7,21 28.2,22.5 v1(28.2,27.6)
  Bottom Layer w0.2: HDR2.30@26.1,16.5 26.1,17.6 26.7,18.2 v1(26.7,18.7) ; v1(28.2,27.6) U1.C6@28.7,28.1
RAM0_DATA7: HDR2.28 U1.C5 | length 13.2
  MidLayer1 w0.2: v1(25.6,21.7) 27.7,23.8 27.7,27.1 v1(27.2,27.6)
  Bottom Layer w0.2: HDR2.28@25.3,16.5 25.3,17.8 25.1,18 25.1,21.2 v1(25.6,21.7) ; v1(27.2,27.6) U1.C5@27.7,28.1
RAM0_OE: HDR1.41 U1.Y9 | length 16.1
  MidLayer1 w0.2: v1(30.9,58.9) 30.9,58.3 32.2,57 v1(32.2,45.6)
  Bottom Layer w0.2: v1(30.9,58.9) 30.9,59.1 HDR1.41@30.9,60.5 ; U1.Y9@31.7,45.1 v1(32.2,45.6)
RAM0_WE: HDR1.79 U1.AB17 | length 16.1
  Bottom Layer w0.2: U1.AB17@39.7,47.1 39.7,47.9 46.1,54.3 HDR1.79@46.1,60.5
RAM1_DATA0: HDR1.45 U1.AA5 | length 16.5
  Bottom Layer w0.2: U1.AA5@27.7,46.1 28.2,46.6 28.2,47.5 28.1,47.6 28.1,51.597 32.5,55.997 HDR1.45@32.5,60.5
RAM1_DATA1: HDR1.49 U1.AA6 | length 16.9
  Bottom Layer w0.2: U1.AA6@28.7,46.1 29.2,46.6 29.2,47.8 28.9,48.1 28.9,51.266 34.1,56.466 HDR1.49@34.1,60.5
RAM1_DATA2: HDR1.53 U1.AA7 | length 17.3
  Bottom Layer w0.2: U1.AA7@29.7,46.1 30.2,46.6 30.2,48 29.7,48.5 29.7,50.9 35.7,56.9 HDR1.53@35.7,60.5
RAM1_DATA3: HDR1.57 U1.AA8 | length 17.1
  Bottom Layer w0.2: U1.AA8@30.7,46.1 31.2,46.6 31.2,49 31.4,49.2 31.4,51.4 37.3,57.3 HDR1.57@37.3,60.5
RAM1_DATA4: HDR1.55 U1.AB8 | length 16.3
  Bottom Layer w0.2: U1.AB8@30.7,47.1 30.7,48.1 30.1,48.7 30.1,50.7 31.3,51.9 36.5,57.1 HDR1.55@36.5,60.5
RAM1_DATA5: HDR1.51 U1.AB7 | length 15.9
  Bottom Layer w0.2: U1.AB7@29.7,47.1 29.7,47.9 29.3,48.3 29.3,51.1 34.9,56.7 HDR1.51@34.9,60.5
RAM1_DATA6: HDR1.47 U1.AB6 | length 15.5
  Bottom Layer w0.2: U1.AB6@28.7,47.1 28.7,47.7 28.5,47.9 28.5,51.431 33.3,56.231 HDR1.47@33.3,60.5
RAM1_DATA7: HDR1.43 U1.AB5 | length 15.1
  Bottom Layer w0.2: U1.AB5@27.7,47.1 27.7,51.763 31.7,55.763 HDR1.43@31.7,60.5
RAM1_OE: HDR1.39 U1.W10 | length 17.5
  MidLayer1 w0.127: 31.7,45.1 31.7,46.1
  MidLayer1 w0.2: v1(30.1,57.7) 31.7,56.1 31.7,46.1 ; 31.7,45.1 v1(32.2,44.6)
  Bottom Layer w0.2: v1(30.1,57.7) HDR1.39@30.1,60.5 ; v1(32.2,44.6) U1.W10@32.7,44.1
RAM1_WE: HDR1.61 U1.AA9 | length 17.4
  Bottom Layer w0.2: U1.AA9@31.7,46.1 32.2,46.6 32.2,51 38.9,57.7 HDR1.61@38.9,60.5
RAM_ADDR0: HDR1.21 U1.W6 | length 19.3
  MidLayer1 w0.2: v1(22.9,58.9) 22.9,56.6 22.3,56 22.3,50.8 23.554,49.546 23.554,49.246 v1(28.2,44.6)
  Bottom Layer w0.2: v1(22.9,58.9) HDR1.21@22.9,60.5 ; v1(28.2,44.6) U1.W6@28.7,44.1
RAM_ADDR1: HDR1.25 U1.W7 | length 19
  MidLayer1 w0.127: 28.7,45.1 28.7,46.1
  MidLayer1 w0.2: v1(24.5,58.9) 24.5,56.5 24,56 24,53.3 28.7,48.6 28.7,46.1 ; 28.7,45.1 v1(29.2,44.6)
  Bottom Layer w0.2: v1(24.5,58.9) HDR1.25@24.5,60.5 ; v1(29.2,44.6) U1.W7@29.7,44.1
RAM_ADDR2: HDR1.29 U1.W9 | length 19.1
  MidLayer1 w0.2: v1(26.1,58.9) 26.1,57.6 25.7,57.2 25.7,52.9 29.822,48.778 29.822,45.978 v1(31.2,44.6)
  Bottom Layer w0.2: v1(26.1,58.9) HDR1.29@26.1,60.5 ; v1(31.2,44.6) U1.W9@31.7,44.1
RAM_ADDR3: HDR1.33 U1.AB4 | length 14.9
  Bottom Layer w0.2: U1.AB4@26.7,47.1 26.7,51.894 29,54.194 ; HDR1.33@27.7,60.5 27.7,59 29,57.7 29,54.2 28.997,54.197
RAM_ADDR4: HDR1.65 U1.AA13 | length 16.4
  Bottom Layer w0.2: U1.AA13@35.7,46.1 36.2,46.6 36.2,47.5 36.3,47.6 36.3,50.4 40.5,54.6 HDR1.65@40.5,60.5
RAM_ADDR5: HDR1.69 U1.AA14 | length 16.6
  Bottom Layer w0.2: U1.AA14@36.7,46.1 37.2,46.6 37.2,49.8 42.1,54.7 HDR1.69@42.1,60.5
RAM_ADDR6: HDR1.73 U1.AA15 | length 16.9
  Bottom Layer w0.2: U1.AA15@37.7,46.1 38.2,46.6 38.2,48.3 43.7,53.8 HDR1.73@43.7,60.5
RAM_ADDR7: HDR1.77 U1.AA16 | length 17.5
  Bottom Layer w0.2: U1.AA16@38.7,46.1 39.2,46.6 39.2,48.1 45.7,54.6 45.7,58.7 45.3,59.1 HDR1.77@45.3,60.5
RAM_ADDR8: HDR1.75 U1.AB16 | length 15.8
  Bottom Layer w0.2: U1.AB16@38.7,47.1 38.7,48.2 44.1,53.6 44.1,58.7 44.5,59.1 HDR1.75@44.5,60.5
RAM_ADDR9: HDR1.71 U1.AB15 | length 15.6
  Bottom Layer w0.2: U1.AB15@37.7,47.1 37.7,48.5 42.9,53.7 HDR1.71@42.9,60.5
RAM_ADDR10: HDR1.67 U1.AB14 | length 15.3
  Bottom Layer w0.2: U1.AB14@36.7,47.1 36.7,50.1 41.3,54.7 HDR1.67@41.3,60.5
RAM_ADDR11: HDR1.63 U1.AB10 | length 16.4
  Bottom Layer w0.2: U1.AB10@32.7,47.1 32.7,49.9 32.6,50 32.6,50.8 39.7,57.9 HDR1.63@39.7,60.5
RAM_ADDR12: HDR1.59 U1.AB9 | length 16.1
  Bottom Layer w0.2: U1.AB9@31.7,47.1 31.7,48.7 31.8,48.8 31.8,51.2 38.1,57.5 HDR1.59@38.1,60.5
RAM_ADDR13: HDR1.35 U1.AA4 | length 15.9
  Bottom Layer w0.2: U1.AA4@26.7,46.1 27.2,46.6 27.2,51.828 29.4,54.028 29.4,57.9 28.5,58.8 HDR1.35@28.5,60.5
RAM_ADDR14: HDR1.31 U1.AA3 | length 16.3
  Bottom Layer w0.2: U1.AA3@25.7,46.1 26.2,46.6 26.2,52 28.6,54.4 28.6,57.534 26.9,59.234 HDR1.31@26.9,60.5
RAM_ADDR15: HDR1.27 U1.Y7 | length 17.2
  MidLayer1 w0.2: v1(25.3,58.4) 25.3,52.7 29.2,48.8 v1(29.2,45.6)
  Bottom Layer w0.2: v1(25.3,58.4) 25.3,58.5 HDR1.27@25.3,60.5 ; v1(29.2,45.6) U1.Y7@29.7,45.1
RAM_ADDR16: HDR1.23 U1.Y6 | length 18.3
  MidLayer1 w0.2: v1(23.7,58.4) 23.7,56.8 22.7,55.8 22.7,51.1 v1(28.2,45.6)
  Bottom Layer w0.2: v1(23.7,58.4) HDR1.23@23.7,60.5 ; v1(28.2,45.6) U1.Y6@28.7,45.1
RAM_CS: HDR1.37 U1.Y8 | length 16.4
  MidLayer1 w0.2: v1(29.3,58.9) 29.3,49.866 31.2,47.966 v1(31.2,45.6)
  Bottom Layer w0.2: v1(29.3,58.9) HDR1.37@29.3,60.5 ; U1.Y8@30.7,45.1 v1(31.2,45.6)
RED0: HDR1.6 U1.K3 | length 49.8
  MidLayer1 w0.2: v1(16.5,69.6) 16.5,65.294 11.7,60.494 11.7,55.6 15.3,52 15.3,37.297 17.997,34.6 v1(25.2,34.6)
  Bottom Layer w0.2: HDR1.6@16.5,67.3 v1(16.5,69.6) ; v1(25.2,34.6) U1.K3@25.7,35.1
RED1: HDR1.8 U1.L4 | length 49.1
  MidLayer1 w0.127: 24.7,35.1 25.7,35.1
  MidLayer1 w0.2: v1(17.3,68.9) 17.3,65.528 12.1,60.328 12.1,55.8 15.7,52.2 15.7,41.4 15.7,37.463 18.063,35.1 24.7,35.1 ; 25.7,35.1 v1(26.2,35.6)
  Bottom Layer w0.2: HDR1.8@17.3,67.3 v1(17.3,68.9) ; v1(26.2,35.6) U1.L4@26.7,36.1
REF_CLK: HDR2.4 TP8.1 U1.B11 | length 29.7
  Top Layer w0.2: TP8.1@14,18.5 18.5,18.5 20.1,20.1 22.2,20.1 23.1,21 23.4,21 23.8,21.4 24.4,21.4 25.4,22.4 26.9,22.4 28,23.5 31.9,23.5 32.9,24.5 v1(33.8,24.5)
  MidLayer1 w0.2: v1(33.2,27.6) 33.2,25.1 v1(33.8,24.5)
  Bottom Layer w0.2: TP8.1@14,18.5 15.2,18.5 15.7,18 HDR2.4@15.7,16.5 ; v1(33.2,27.6) U1.B11@33.7,27.1
SCL: HDR2.5 U1.P19 U2.14 | length 110.6
  Top Layer w0.2: U2.14@3.047,24.5 U2.14@3.047,24.6 3.047,26.247 v1(3.4,26.6)
  Top Layer w0.3: v1(12.8,5.8) 13.4,6.4 16,6.4 16.5,6.9 v1(16.5,7.7)
  MidLayer2 w0.127: 42.7,39.1 43.7,39.1
  MidLayer2 w0.2: v1(42.2,38.6) 42.7,39.1 ; 43.7,39.1 45.6,39.1 46.9,37.8 46.9,36.3 49.4,33.8 49.4,25.6 48.4,24.6 48.4,21 48.303,20.903 ; v1(46.9,6.6) 46.9,7.3 47.5,7.9 47.5,20.1 47.7,20.3 48.3,20.906
  Bottom Layer w0.2: v1(3.4,26.6) 1.9,25.1 1.9,18.1 2.9,17.1 4.2,15.8 4.2,10.2 8.6,5.8 v1(12.8,5.8) ; HDR2.5@16.5,9.7 v1(16.5,7.7) 20.9,3.3 43.5,3.3 v1(46.9,6.6) ; U1.P19@41.7,39.1 v1(42.2,38.6)
SDA: HDR2.3 U1.R20 U2.12 | length 107.5
  Top Layer w0.2: v1(4.3,22.8) 4.3,24.582 U2.12@4.317,24.6
  Top Layer w0.3: v1(12.1,6.4) 12.8,7.1 v1(15.7,7.1)
  MidLayer2 w0.2: v1(43.2,39.6) 45.7,39.6 47.3,38 47.3,36.5 49.8,34 49.8,21.8 48.3,20.3 48.3,11.5 47.9,11.1 47.9,7.9 48.5,7.3 v1(48.6,6.8)
  Bottom Layer w0.2: v1(4.3,22.8) 2.8,22.8 2.3,22.3 2.3,18.3 4.6,16 4.6,10.366 8.566,6.4 v1(12.1,6.4) ; HDR2.3@15.7,9.7 v1(15.7,7.1) 18.439,4.361 19.239,4.361 20.7,2.9 44.6,2.9 v1(48.6,6.8) ; U1.R20@42.7,40.1 v1(43.2,39.6)
SP0: HDR2.79 U1.D18 | length 27.1
  MidLayer1 w0.127: 40.7,27.1 40.7,28.1
  MidLayer1 w0.2: v1(40.2,28.6) 40.7,28.1 ; 40.7,27.1 46.1,21.7 v1(46.1,7.2)
  Bottom Layer w0.2: v1(40.2,28.6) U1.D18@40.7,29.1 ; v1(46.1,7.2) 46.1,7.3 HDR2.79@46.1,9.7
SP1: HDR2.81 U1.C18 | length 24
  MidLayer1 w0.2: v1(41.2,27.6) 46.9,21.9 v1(46.9,8.2)
  Bottom Layer w0.2: U1.C18@40.7,28.1 v1(41.2,27.6) ; v1(46.9,8.2) HDR2.81@46.9,9.7
SP2: HDR2.83 U1.F18 | length 29.3
  MidLayer1 w0.2: v1(41.2,30.6) 41.2,29.6 44.4,26.4 44.4,25.4 47.7,22.1 v1(47.7,7.2)
  Bottom Layer w0.2: U1.F18@40.7,31.1 v1(41.2,30.6) ; v1(47.7,7.2) 47.7,7.3 HDR2.83@47.7,9.7
SP3: HDR2.85 U1.E19 | length 27.9
  MidLayer1 w0.127: 42.7,30.1 43.7,30.1
  MidLayer1 w0.2: v1(42.2,29.6) 42.7,30.1 ; 43.7,30.1 43.8,30.1 46.7,27.2 46.7,23.9 48.5,22.1 v1(48.5,8.2)
  Bottom Layer w0.2: U1.E19@41.7,30.1 v1(42.2,29.6) ; v1(48.5,8.2) HDR2.85@48.5,9.7
SP4: HDR2.87 U1.E20 | length 29.5
  MidLayer1 w0.2: v1(43.2,30.6) 44,30.6 47.2,27.4 47.2,24.3 49.4,22.1 v1(49.4,7.3)
  Bottom Layer w0.2: U1.E20@42.7,30.1 v1(43.2,30.6) ; HDR2.87@49.3,9.7 49.3,7.3 v1(49.4,7.3)
SP5: HDR2.89 U1.F19 | length 30.2
  MidLayer1 w0.127: 42.7,31.1 43.7,31.1
  MidLayer1 w0.2: v1(42.2,30.6) 42.7,31.1 ; 43.7,31.1 44.4,31.1 49.9,25.6 49.9,18.5 50.3,18.1 v1(50.3,8.2)
  Bottom Layer w0.2: U1.F19@41.7,31.1 v1(42.2,30.6) ; HDR2.89@50.1,9.7 50.1,8.2 v1(50.3,8.2)
SP6: HDR2.91 U1.F20 | length 31.7
  MidLayer1 w0.2: v1(43.2,31.6) 45,31.6 50.3,26.3 50.3,18.9 50.9,18.3 v1(50.9,7.4)
  Bottom Layer w0.2: U1.F20@42.7,31.1 v1(43.2,31.6) ; HDR2.91@50.9,9.7 v1(50.9,7.4) ; v1(50.9,7.4) 50.9,7.3 v1(50.9,7.4)
SP7: HDR2.92 U1.B19 | length 14.6
  Bottom Layer w0.2: U1.B19@41.7,27.1 42.2,26.6 42.2,25.7 42.5,25.4 42.9,25.4 50.9,17.4 HDR2.92@50.9,16.5
SP8: HDR2.90 U1.A19 | length 13.4
  Bottom Layer w0.2: U1.A19@41.7,26.1 41.7,25.4 42.1,25 42.6,25 50.1,17.5 HDR2.90@50.1,16.5
SP9: HDR2.88 U1.B18 | length 14.5
  Bottom Layer w0.2: U1.B18@40.7,27.1 41.2,26.6 41.2,25.3 41.9,24.6 42.4,24.6 49.3,17.7 HDR2.88@49.3,16.5